# EAGLE board CT_schematic (EAGLE 7.6.0)

Size 100 x 80 mm. Coordinates in mm from the lower left corner, seen from the top.
Outline: 0,0 100,0 100,80 0,80 0,0
Copper layers (1*16): Top 0.035mm / dielectric 1.5mm / Bottom 0.035mm
Design rules "default": minimum track width 10mil, minimum drill 24mil, track to track 8mil, track to pad 8mil, pad to pad 8mil, via to via 8mil, smd to smd 8mil, copper to edge 40mil, drill to drill 8mil, minimum pad ring 10mil, minimum via ring 8mil, stop-mask expansion 4mil, vias tented up to drill 0mil, thermal gap 10mil

## Footprints (pad centres in the part's own frame; a part is rotated, then mirrored left to right if it is on the bottom)
C0603 = smd 0.8 x 0.8: 1 -0.762,0; 2 0.762,0
C0402 = smd 0.5 x 0.5: 1 -0.508,0; 2 0.508,0
C1210 = smd 1.2 x 2.5: 1 -1.524,0; 2 1.524,0
EXV-9H = smd 3.505 x 1.676: 1 -2.857,0; 2 2.857,0
PJ-037B_PACKAGE = drill 3.7 square: 1 12,0 | drill 3.2 square: 2 6,0
R0603 = smd 0.8 x 0.8: 1 -0.762,0; 2 0.762,0
TSSOP14 = smd 0.35 x 1: 1 -1.95,-2.825; 2 -1.3,-2.825; 3 -0.65,-2.825; 4 0,-2.825; 5 0.65,-2.825; 6 1.3,-2.825; 7 1.95,-2.825; 8 1.95,2.825; 9 1.3,2.825; 10 0.65,2.825; 11 0,2.825; 12 -0.65,2.825; 13 -1.3,2.825; 14 -1.95,2.825
SAMTEC_FTSH-105-01-L-DV-K = smd 0.762 x 2.794: 1 -2.54,-2.032; 2 -2.54,2.032; 3 -1.27,-2.032; 4 -1.27,2.032; 5 0,-2.032; 6 0,2.032; 7 1.27,-2.032; 8 1.27,2.032; 9 2.54,-2.032; 10 2.54,2.032
DFN8-S = smd 0.6 x 0.4: 1 -2.69,1.905; 2 -2.69,0.635; 3 -2.69,-0.635; 4 -2.69,-1.905; 5 2.69,-1.905; 6 2.69,-0.635; 7 2.69,0.635; 8 2.69,1.905
ASEK = smd 1.4 x 1: 1 -1.1,-0.8; 2 1.1,-0.8; 3 1.1,0.8; 4 -1.1,0.8
ASFL1 = smd 1.7 x 1.5: 1 -1.27,-1.1; 2 1.27,-1.1; 3 1.27,1.1; 4 -1.27,1.1
SOIC-8_EP = smd 1.6 x 0.533: 1 -2.921,1.905; 2 -2.921,0.635; 3 -2.921,-0.635; 4 -2.921,-1.905; 5 2.921,-1.905; 6 2.921,-0.635; 7 2.921,0.635; 8 2.921,1.905 | smd 2.54 x 3.302: EPAD 0,0 | drill 0.406 pad 0.406: P$1 -0.508,0.635; P$2 0.381,0.635; P$3 -0.508,-0.635; P$4 0.381,-0.635
SON-6 = smd 0.55 x 0.3: 1 -0.355,0.5 | smd 0.52 x 0.3: 2 -0.37,0; 3 -0.37,-0.5; 4 0.37,-0.5; 5 0.37,0; 6 0.37,0.5
SW_4-1437565-2 = smd 1.4 x 2.1: 1 -2.23,4.55; 2 -2.23,-4.55; 3 2.23,4.55; 4 2.23,-4.55
LGM67K-G1J2-24-Z = smd 0.8 x 1.4: A -2,0; C 0,0
NC7SZ125M5X = smd 1.3 x 0.7: 1 -1.3,0.95; 2 -1.3,0; 3 -1.3,-0.95; 4 1.3,-0.95; 5 1.3,0.95

## Placement (x,y rotation side)
C1  1e-07  [C0603]  -48.26,50.8 0 top  (outside the outline)
C2  1e-07  [C0603]  -52.07,50.8 0 top  (outside the outline)
C3  1e-07  [C0603]  -55.88,50.8 0 top  (outside the outline)
C4  1e-07  [C0603]  -59.69,50.8 0 top  (outside the outline)
C5  4.7e-06  [C0603]  -44.45,50.8 0 top  (outside the outline)
C6  1e-07  [C0402]  -45.72,55.88 0 top  (outside the outline)
C7  1e-08  [C0402]  -49.53,55.88 0 top  (outside the outline)
C8  1e-08  [C0402]  -53.34,55.88 0 top  (outside the outline)
C9  1e-08  [C0402]  -57.15,55.88 0 top  (outside the outline)
C10  1e-05  [C1210]  -38.1,38.1 0 top  (outside the outline)
C11  1e-05  [C1210]  -44.45,38.1 0 top  (outside the outline)
C12  1e-05  [C1210]  -50.8,38.1 0 top  (outside the outline)
C13  1e-05  [C1210]  -57.15,38.1 0 top  (outside the outline)
C14  1e-07  [C0402]  -60.96,55.88 0 top  (outside the outline)
C15  0.0001  [EXV-9H]  -46.99,30.48 0 top  (outside the outline)
C16  0.0001  [EXV-9H]  -58.42,30.48 0 top  (outside the outline)
C17  1e-08  [C0402]  -15.24,60.96 0 top  (outside the outline)
C18  1e-08  [C0402]  -19.05,60.96 0 top  (outside the outline)
J1  PJ-037B  [PJ-037B_PACKAGE]  -57.15,7.62 0 top  (outside the outline)
R1  10000.0  [R0603]  -46.99,44.45 0 top  (outside the outline)
R2  1000.0  [R0603]  -15.24,55.88 0 top  (outside the outline)
R3  1600.5  [R0603]  -19.05,55.88 0 top  (outside the outline)
R4  4700.0  [R0603]  -22.86,55.88 0 top  (outside the outline)
R5  2200.0  [R0603]  -26.67,55.88 0 top  (outside the outline)
R6  2200.0  [R0603]  -30.48,55.88 0 top  (outside the outline)
R7  10000.0  [R0603]  -52.07,44.45 0 top  (outside the outline)
R8  10000.0  [R0603]  -57.15,44.45 0 top  (outside the outline)
R9  10000.0  [R0603]  -62.23,44.45 0 top  (outside the outline)
R10  10000.0  [R0603]  -15.24,50.8 0 top  (outside the outline)
R11  5.0  [R0603]  -34.29,55.88 0 top  (outside the outline)
R12  10000.0  [R0603]  -20.32,50.8 0 top  (outside the outline)
R13  10000.0  [R0603]  -25.4,50.8 0 top  (outside the outline)
R14  10000.0  [R0603]  -30.48,50.8 0 top  (outside the outline)
R15  4031.5447154472  [R0603]  -31.75,44.45 0 top  (outside the outline)
R16  2200.0  [R0603]  -38.1,55.88 0 top  (outside the outline)
R17  10000.0  [R0603]  -35.56,50.8 0 top  (outside the outline)
R18  10000.0  [R0603]  -40.64,50.8 0 top  (outside the outline)
R19  9100.0  [R0603]  -41.91,55.88 0 top  (outside the outline)
R20  680000.0  [R0603]  -36.83,44.45 0 top  (outside the outline)
R21  120000.0  [R0603]  -41.91,44.45 0 top  (outside the outline)
U1  STM32L011D3P6  [TSSOP14]  -16.51,30.48 0 top  (outside the outline)
U2  FTSH-105-01-L-DV-K  [SAMTEC_FTSH-105-01-L-DV-K]  -35.56,7.62 0 top  (outside the outline)
U3  24AA256-I/MF  [DFN8-S]  -41.91,20.32 0 top  (outside the outline)
U4  ASEK-32.768KHz-ECST  [ASEK]  -38.1,30.48 0 top  (outside the outline)
U5  ASFL1-12MHZ-NCS  [ASFL1]  -58.42,19.05 0 top  (outside the outline)
U6  MIC5234YME  [SOIC-8_EP]  -17.78,38.1 0 top  (outside the outline)
U7  TPS3895ADRYR  [SON-6]  -21.59,59.69 0 top  (outside the outline)
U8  4-1437565-2  [SW_4-1437565-2]  -27.94,20.32 0 top  (outside the outline)
U9  Q65110A2395  [LGM67K-G1J2-24-Z]  -26.67,38.1 0 top  (outside the outline)
U10  nc7sz125m5x  [NC7SZ125M5X]  -15.24,44.45 0 top  (outside the outline)
U11  nc7sz125m5x  [NC7SZ125M5X]  -21.59,44.45 0 top  (outside the outline)

## Library data of the parts
C1-C18 J1 R1-R21 U1-U11 = circuit_tree

## Nets
CLK_U1_2: U1.2 U4.3
CLK_U1_5: U1.5 U5.3
GND: C1.2 C2.2 C3.2 C4.2 C5.2 C6.2 C7.2 C8.2 C9.2 C10.2 C11.2 C12.2 C13.2 C14.2 C15.2 C16.2 C17.2 C18.2 J1.2 R2.2 R7.2 R11.2 R16.2 R19.2 R21.2 U1.9 U2.3 U2.5 U3.4 U3.7 U4.2 U5.2 U6.7 U6.EPAD U7.2 U9.C U10.2 U10.3 U11.1 U11.3
NET_U1_1: R7.1 U1.1
NET_U1_4: R4.1 U1.4 U11.4
NET_U1_7: R5.1 U1.7 U3.6
NET_U1_8: R3.1 U1.8 U9.A
NET_U1_11: R1.1 U1.11 U8.3 U8.4
NET_U1_12: R6.1 U1.12 U3.5
NET_U2_9: R11.1 U2.9
NET_U3_1: R12.1 U3.1
NET_U3_2: R13.1 U3.2
NET_U3_3: R14.1 U3.3
NET_U6_4: R15.2 R16.1 U6.4
NET_U7_1: R18.1 R19.1 U7.1
NET_U7_3: R20.2 R21.1 U7.3
NET_U7_4: R17.1 U7.4 U10.4 U11.2
NET_U8_1: R2.1 U8.1 U8.2
PROC_SYS_SWCLK: R9.1 U1.14 U2.4
PROC_SYS_SWDIO: R10.1 U1.13 U2.2
RST_OUT_U2_JTAG_RST_B: R8.1 U2.10 U10.1
VCC_S1_16V8: C10.1 C11.1 C15.1 C16.1 J1.1 U6.5 U6.8
VCC_TIER1_3V3: C1.1 C2.1 C3.1 C4.1 C5.1 C6.1 C7.1 C8.1 C9.1 C12.1 C13.1 C14.1 C17.1 C18.1 R1.2 R3.2 R4.2 R5.2 R6.2 R8.2 R9.2 R10.2 R12.2 R13.2 R14.2 R15.1 R17.2 R18.2 R20.1 U1.10 U2.1 U3.8 U4.4 U5.4 U6.1 U7.6 U10.5 U11.5

## Tracks (layer width: path | path; a pad name or v marks a point on that pad's centre or on a via)
CLK_U1_2  (1 unrouted)
CLK_U1_5  (1 unrouted)
GND  (39 unrouted)
NET_U1_1  (1 unrouted)
NET_U1_4  (2 unrouted)
NET_U1_7  (2 unrouted)
NET_U1_8  (2 unrouted)
NET_U1_11  (3 unrouted)
NET_U1_12  (2 unrouted)
NET_U2_9  (1 unrouted)
NET_U3_1  (1 unrouted)
NET_U3_2  (1 unrouted)
NET_U3_3  (1 unrouted)
NET_U6_4  (2 unrouted)
NET_U7_1  (2 unrouted)
NET_U7_3  (2 unrouted)
NET_U7_4  (3 unrouted)
NET_U8_1  (2 unrouted)
PROC_SYS_SWCLK  (2 unrouted)
PROC_SYS_SWDIO  (2 unrouted)
RST_OUT_U2_JTAG_RST_B  (2 unrouted)
VCC_S1_16V8  (6 unrouted)
VCC_TIER1_3V3  (37 unrouted)